# Altium PCB W5500-io_V100.PcbDoc
Units mm, origin at the board's own origin, x right, y up, seen from the top; angles counter-clockwise.
Board outline 20 x 24 mm, 4 copper layers (Top Layer, Internal Plane 1, Internal Plane 2, Bottom Layer), stack 0.844 mm thick; 39 components, 29 nets, 160 pads, 54 vias.
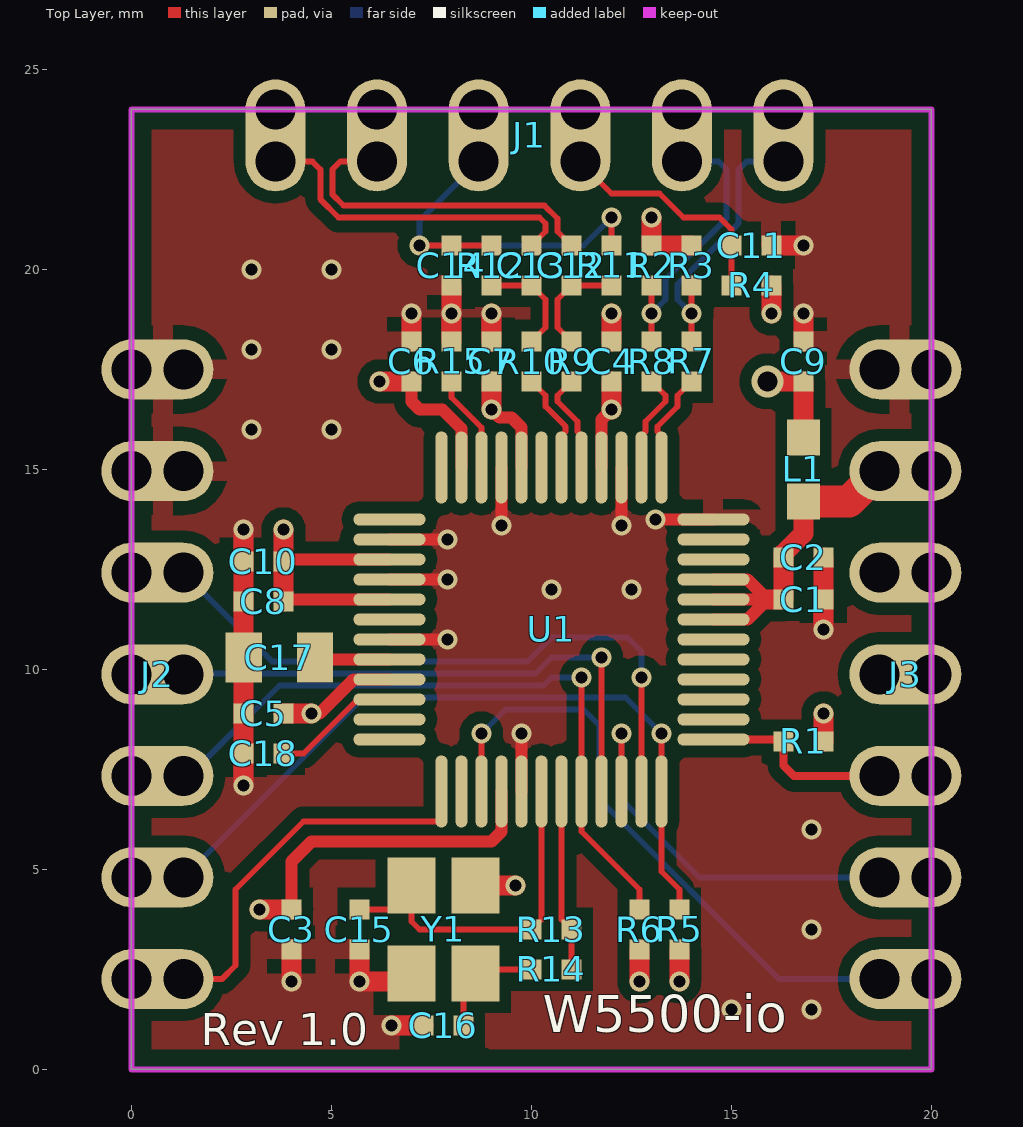
[diagram p0: Top Layer view]
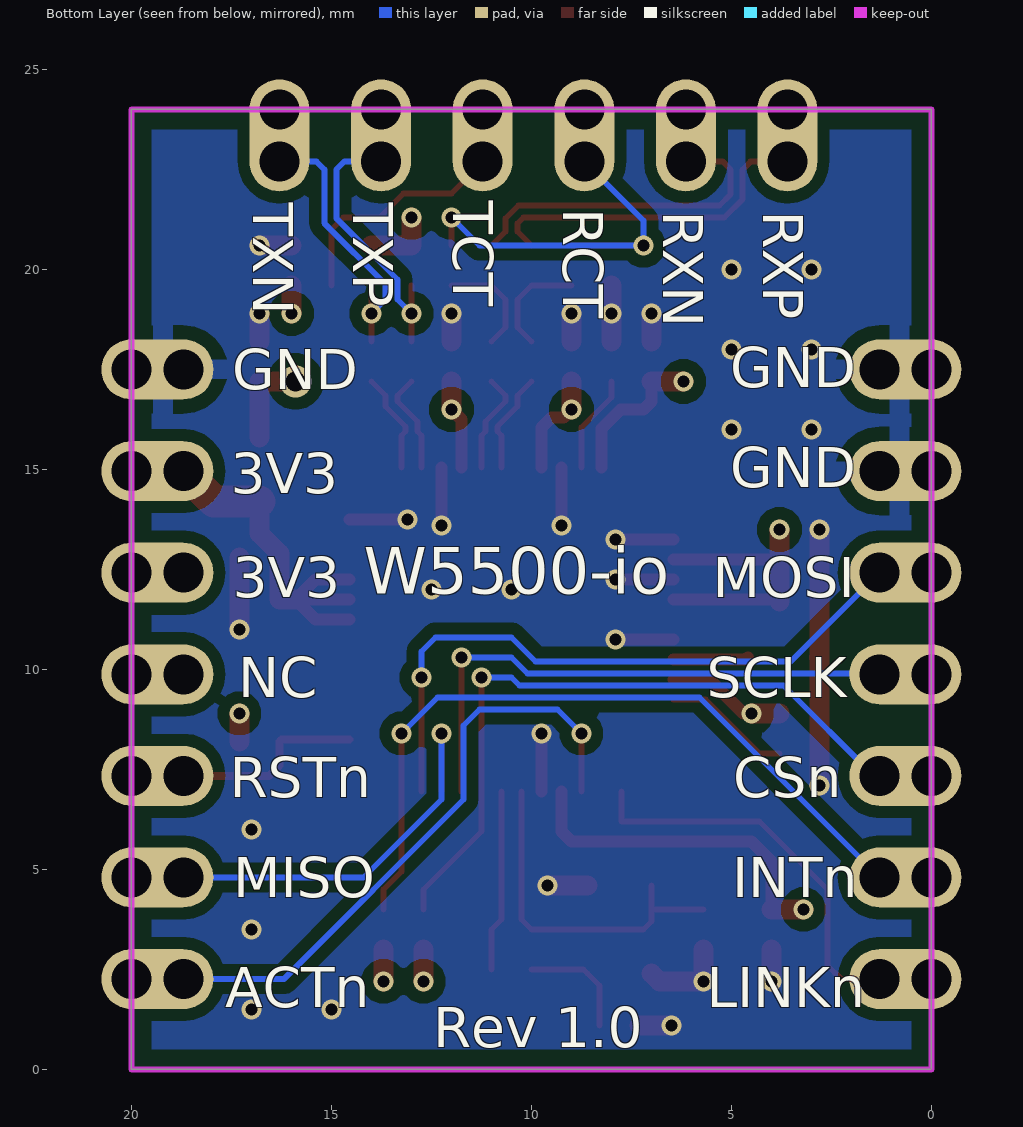
[diagram p1: Bottom Layer view, seen from below]
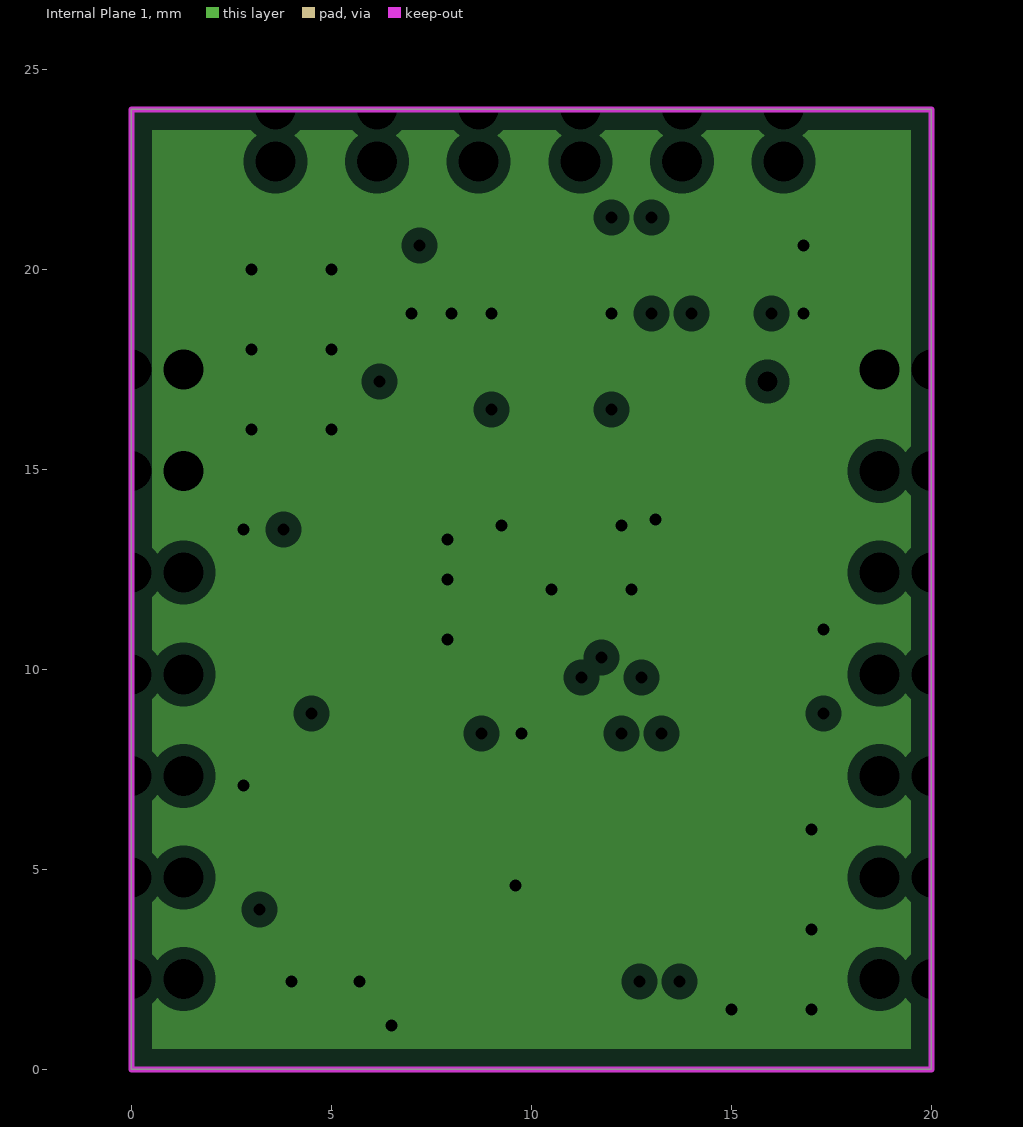
[diagram p2: Internal Plane 1, clearances drawn from the general rule]
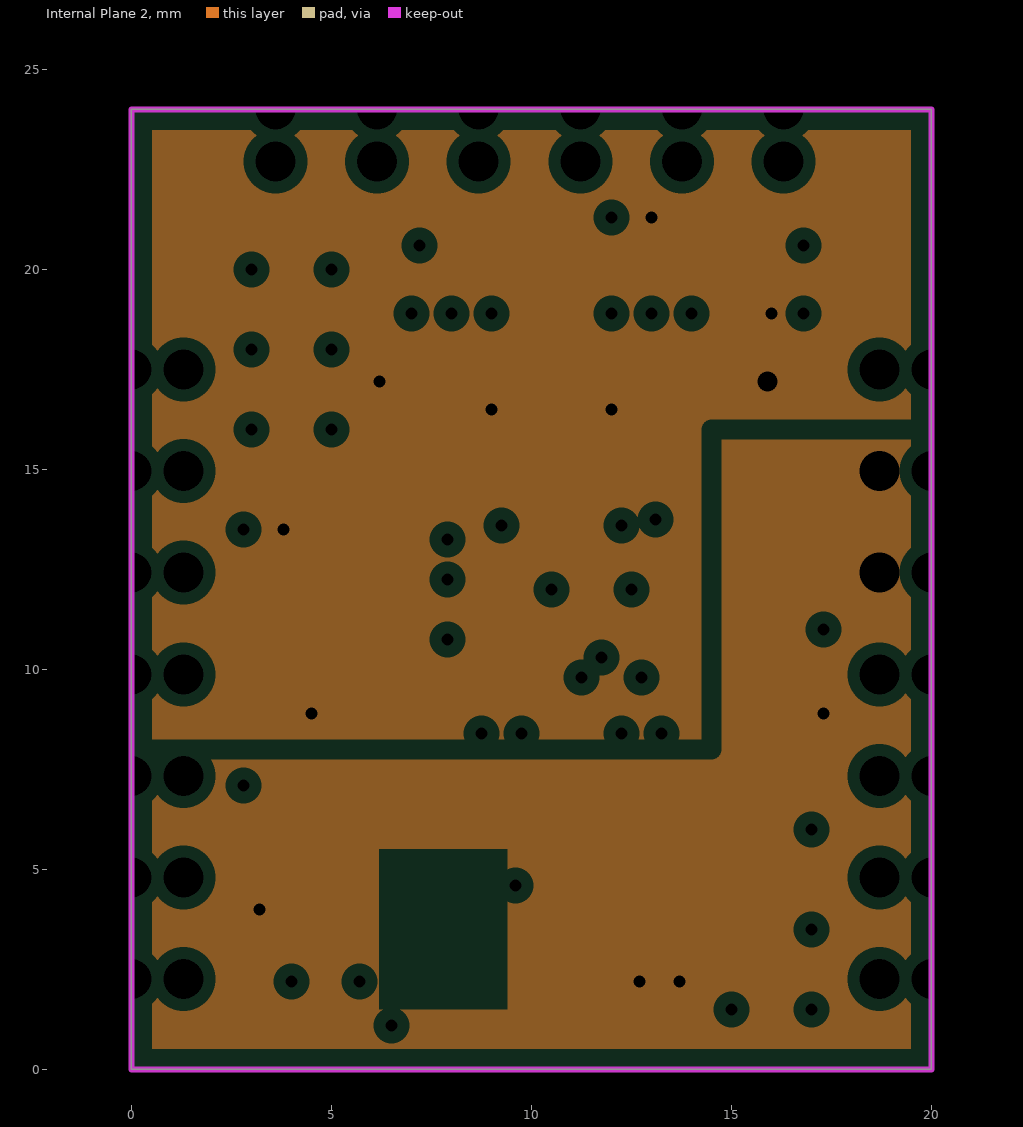
[diagram p3: Internal Plane 2, clearances drawn from the general rule]
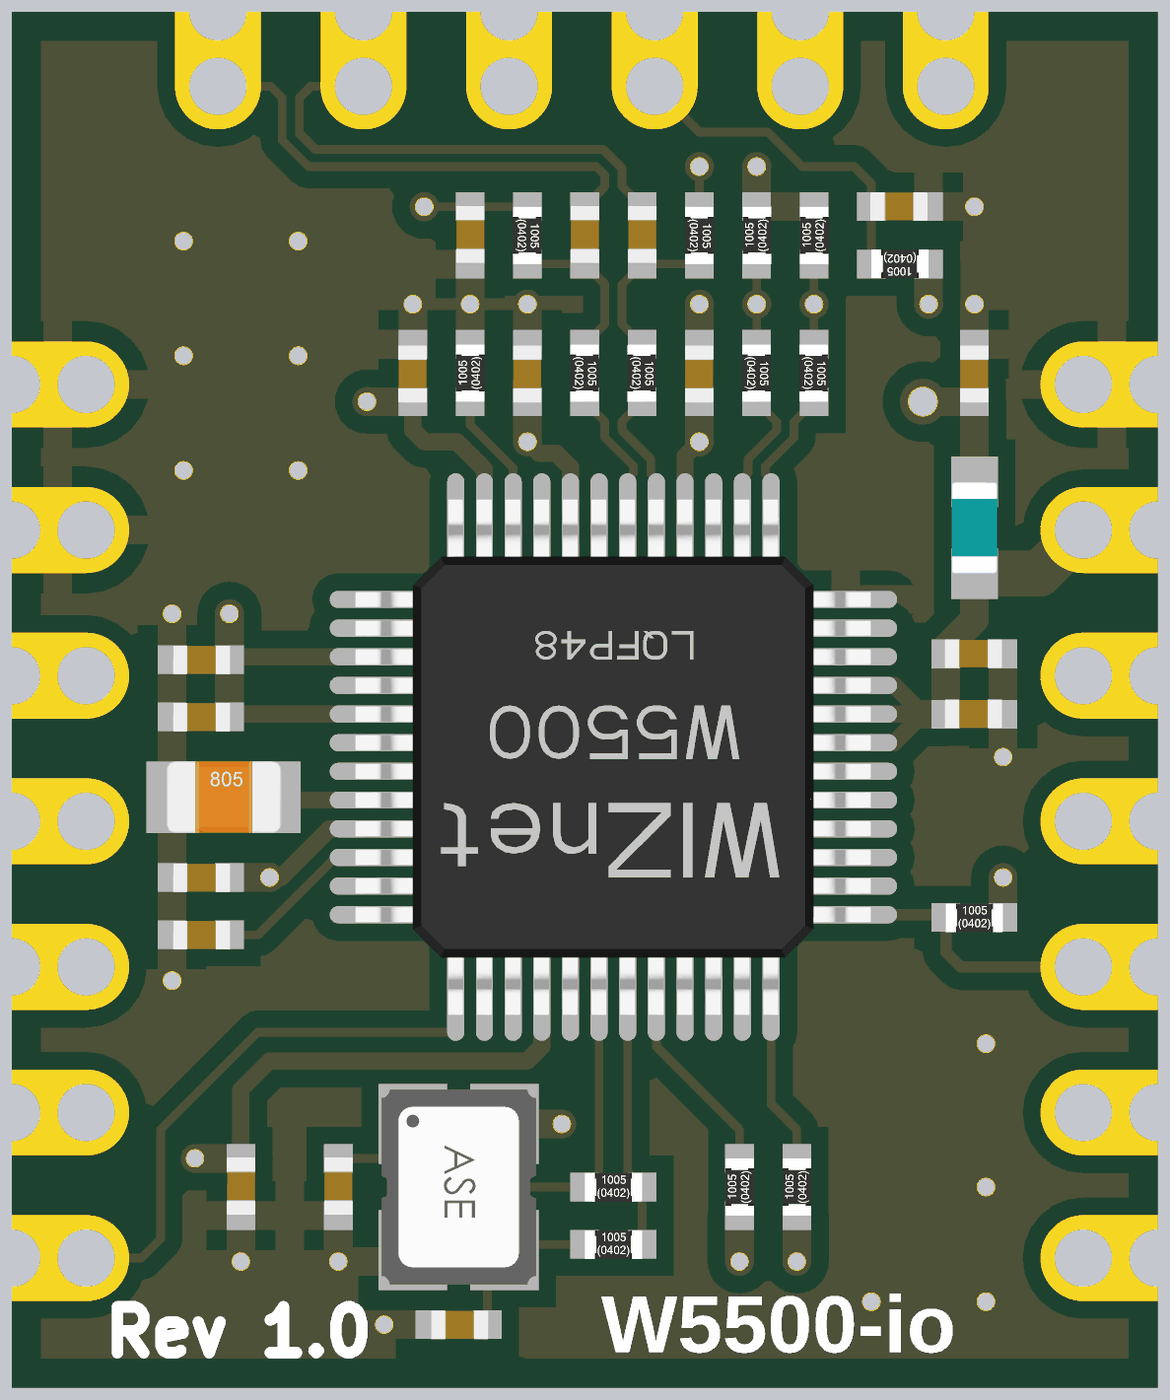
[diagram p4: 3D render of the assembled board from above, using the file's embedded part models]

## Layer stack, top to bottom
Top Solder: solder mask 0.0102, Solder Resist, Dk 3.5
Top Layer: signal copper 0.0356
Dielectric1: core 0.32, FR-4, Dk 4.8
Internal Plane 1: plane copper 0.0356, net GND
Dielectric 6: prepreg 0.127, Dk 4.2
Internal Plane 2: plane copper 0.036, net 3V3A
Dielectric5: core 0.254, FR-4, Dk 4.2
Bottom Layer: signal copper 0.0356
Bottom Solder: solder mask 0.0102, Solder Resist, Dk 3.5

## Board outline
0,0 0,24 20,24 20,0

## Design rules (kind name [scope] priority, off if disabled: settings)
BoardOutlineClearance [All] p1: gap=0.5 ignorepadtopadclearanceinfootprint=FALSE
Clearance [All] p1: gap=0.15 ignorepadtopadclearanceinfootprint=FALSE except(0: Arc-Hole Track-Hole SMDPad-Hole THPad-Hole Via-Hole Fill-Hole Region-Hole Text-Hole; 0.3: Arc-Poly Track-Poly SMDPad-Poly THPad-Poly Via-Poly Fill-Poly Poly-Poly Poly-Region Poly-Text Poly-Hole)
DiffPairsRouting [All] p1: maxlimit=0.15 minlimit=0.15 mostfreqgap=0.15 toplayer_minwidth=0.15 toplayer_maxwidth=0.15 toplayer_prefwidth=0.15 bottomlayer_minwidth=0.15 bottomlayer_maxwidth=0.15 bottomlayer_prefwidth=0.15 maxuncoupledlength=15.24
HoleSize [All] p1: absolutevalues=TRUE maxlimit=4.064 minlimit=0.025 maxpercent=80.000 minpercent=20.000
PlaneClearance [All] p1: clearance=0.3
PlaneConnect [All] p1: planeconnectstyle=Direct reliefexpansion=0.508 reliefentries=4 reliefconductorwidth=0.254 reliefairgap=0.254
PolygonConnect [All] p1: thpad.connectstyle=Relief thpad.reliefconductorwidth=0.5 thpad.reliefentries=4 thpad.polygonreliefangle="90 Angle" thpad.airgapwidth=0.35 smdpad.connectstyle=Relief smdpad.reliefconductorwidth=0.5 smdpad.reliefentries=4 smdpad.polygonreliefangle="90 Angle" smdpad.airgapwidth=0.35 via.connectstyle=Direct via.reliefconductorwidth=0.254 via.reliefentries=4 via.polygonreliefangle="90 Angle" via.airgapwidth=0.254
RoutingVias [All] p1: holewidth=0.3 width=0.5 viastyle="Through Hole" minholewidth=0.3 minwidth=0.5 maxholewidth=0.5 maxwidth=0.8
SolderMaskExpansion [All] p1: expansion=0 istentingtop=FALSE
Width [All] p1: maxlimit=2.54 minlimit=0.102 preferedwidth=0.152
26 further rules are at their usual default settings.

## Classes and differential pairs
differential pair NewDifferentialPair5: +NetC13_1 -NetC12_1
differential pair NewDifferentialPair4: +NetR10_2 -NetR9_2
differential pair NewDifferentialPair3: +NetR8_2 -NetR7_2
differential pair NewDifferentialPair2: +RX_N -RX_P
differential pair NewDifferentialPair1: +TX_N -TX_P

## Components (designator, comment, footprint, x,y, rotation, side; value= is the part's Value field where it differs from the comment)
C1 "1uF" CAP-0402 16.8,11.75 r180 top
C2 "0.1uF" CAP-0402 16.8,12.8 r180 top
C3 "0.1uF" CAP-0402 4,3.5 r90 top
C4 "1uF" CAP-0402 12,17.7 r270 top
C5 "0.1uF" CAP-0402 3.3,8.9 r0 top
C6 "0.1uF" CAP-0402 7,17.7 r270 top
C7 "1uF" CAP-0402 9,17.7 r270 top
C8 "0.1uF" CAP-0402 3.3,11.7 r0 top
C9 "0.1uF" CAP-0402 16.8,17.7 r270 top
C10 "0.1uF" CAP-0402 3.3,12.7 r0 top
C11 "22nF" CAP-0402 15.5,20.6 r180 top
C12 "6.8nF" CAP-0402 11,20.1 r90 top
C13 "6.8nF" CAP-0402 10,20.1 r90 top
C14 "0.1uF" CAP-0402 8,20.1 r90 top
C15 "18pF" CAP-0402 5.7,3.5 r90 top
C16 "18pF" CAP-0402 7.8,1.1 r0 top
C17 "4.7uF" CAP-0805 3.7,10.3 r0 top
C18 "0.1uF" CAP-0402 3.3,7.9 r0 top
J1 "2.54mm 1x6 Pin Header DIP" IDC-1X6(WI510IO) 16.3,22.7 r180 top
J2 "2.54mm 1x7 Pin Header DIP" IDC-1X7(WI510IO) 1.3,17.5 r270 top
J3 "2.54mm 1x7 Pin Header DIP" IDC-1X7(WI510IO) 20,17.5 r270 top
L1 "HH-1M1608-121JT" IND-0603 16.8,15 r90 top
R1 "4.7K" RES-0402 16.8,8.2 r0 top
R2 "49.9R" RES-0402 13,20.1 r90 top
R3 "49.9R" RES-0402 14,20.1 r90 top
R4 "10R/1%" RES-0402 15.5,19.6 r180 top
R5 "4.7K" RES-0402 13.7,3.5 r90 top
R6 "4.7K" RES-0402 12.7,3.5 r90 top
R7 "3.3R" RES-0402 14,17.7 r270 top
R8 "3.3R" RES-0402 13,17.7 r270 top
R9 "3.3R" RES-0402 11,17.7 r270 top
R10 "3.3R" RES-0402 10,17.7 r270 top
R11 "49.9R" RES-0402 12,20.1 r270 top
R12 "49.9R" RES-0402 9,20.1 r270 top
R13 "1M" RES-0402 10.5,3.5 r0 top
R14 "0R" RES-0402 10.5,2.5 r0 top
R15 "12.4K/1%" RES-0402 8,17.7 r90 top
U1 "W5500" W5500-LQFP48 10.5,11 r270 top locked
Y1 "25MHz" OSC-82J0626 7.8,3.5 r270 top

## Footprints (in the part's own frame and the unit in brackets; to place one, negate y for a bottom-side part, rotate by r counter-clockwise, add the part's x,y. Pads: shape width x height; smd on the part's side, far side on the other; paste and mask are expansions set on the pad)
CAP-0402 [mm]
  rect 0.5x0.5 smd: 1(-0.5,0) 2(0.5,0)
  body extent -0.48,-0.25 0.52,0.25, height 0.6
CAP-0805 [mil]
  rect 36x49 smd: 1(-35,0)
  rect 35.43x49 smd: 2(35,0)
  body extent -39,-24 40,25, height 31
IDC-1X6(WI510IO) [mm]
  oval 1.5x2.5 hole 1 copper offset 0,-0.5: 1(0,0) 2(2.54,0) 3(5.08,0) 4(7.62,0) 5(10.16,0) 6(12.7,0)
  oval 1.5x2.5 hole 1 copper offset 0,0.5: 1(0,-1.3) 2(2.54,-1.3) 3(5.08,-1.3) 4(7.62,-1.3) 5(10.16,-1.3) 6(12.7,-1.3)
IDC-1X7(WI510IO) [mm]
  oval 1.5x2.5 hole 1 copper offset 0,-0.5: 1(0,0) 2(2.54,0) 3(5.08,0) 4(7.62,0) 5(10.16,0) 6(12.7,0) 7(15.24,0)
  oval 1.5x2.5 hole 1 copper offset 0,0.5: 1(0,-1.3) 2(2.54,-1.3) 3(5.08,-1.3) 4(7.62,-1.3) 5(10.16,-1.3) 6(12.7,-1.3) 7(15.24,-1.3)
IND-0603 [mm] "Inductor 0603(1608)"
  rect 0.89x0.82 smd: 1(-0.8,0) 2(0.8,0)
  body extent -0.8,-0.4 0.8,0.4, height 0.95
OSC-82J0626 [mm]
  rect 1.4x1.2 smd: 1(-1.1,-0.8) 2(1.1,-0.8) 3(1.1,0.8) 4(-1.1,0.8)
  body extent -1.7,-1.35 1.7,1.35, height 1.06
RES-0402 [mm]
  rect 0.5x0.5 smd: 1(-0.5,0) 2(0.5,0)
  body extent -0.5,-0.25 0.5,0.25, height 0.35
W5500-LQFP48 [mm]
  oval 1.8x0.3 smd: 1(-4.05,2.75) 2(-4.05,2.25) 3(-4.05,1.75) 4(-4.05,1.25) 5(-4.05,0.75) 6(-4.05,0.25) 7(-4.05,-0.25) 8(-4.05,-0.75) 9(-4.05,-1.25) 10(-4.05,-1.75) 11(-4.05,-2.25) 12(-4.05,-2.75) 25(4.05,-2.75) 26(4.05,-2.25) 27(4.05,-1.75) 28(4.05,-1.25) 29(4.05,-0.75) 30(4.05,-0.25) 31(4.05,0.25) 32(4.05,0.75) 33(4.05,1.25) 34(4.05,1.75) 35(4.05,2.25) 36(4.05,2.75)
  oval 0.3x1.8 smd: 13(-2.75,-4.05) 14(-2.25,-4.05) 15(-1.75,-4.05) 16(-1.25,-4.05) 17(-0.75,-4.05) 18(-0.25,-4.05) 19(0.25,-4.05) 20(0.75,-4.05) 21(1.25,-4.05) 22(1.75,-4.05) 23(2.25,-4.05) 24(2.75,-4.05) 37(2.75,4.05) 38(2.25,4.05) 39(1.75,4.05) 40(1.25,4.05) 41(0.75,4.05) 42(0.25,4.05) 43(-0.25,4.05) 44(-0.75,4.05) 45(-1.25,4.05) 46(-1.75,4.05) 47(-2.25,4.05) 48(-2.75,4.05)
  body extent -4.5,-4.5 4.5,4.5, height 1.65

## Part data
C1 C2 C3 C4 C5 C6 C7 C8 C9 C10 C11 C12 C13 C14 C15 C16 C18: library part CAP-0402, "Ceramic CAP 0402(1005)"
C17: library part CAP-0805, "Ceramic CAP 0805(2012)"
L1: library part IND-0603, "Inductor 0603(1608)"
R1 R2 R3 R4 R5 R6 R7 R8 R9 R10 R11 R12 R13 R14 R15: library part RES-0402, "RES-0402"
U1: "WIZnet Hardwired TCP/IP Chip"
Y1: library part OSC-82J0626-25MHz, "X-tal 25MHz,3.2x2.5 SMD, CL=18pF"

## Via types
v1: diameter 0.508, hole 0.305, Top Layer to Bottom Layer, tented both sides, 31 vias
v2: diameter 0.5, hole 0.3, Top Layer to Bottom Layer, tented both sides, 22 vias
v3: diameter 0.8, hole 0.5, Top Layer to Bottom Layer, tented both sides, 1 vias

## Nets (pads, with @x,y where several pads share a name; then routed paths per layer and width w, separated by ;. In a path a pad name is that pad's centre, name@x,y a point inside that pad or via, vN(x,y) a via of type N, cw(c..) or ccw(c..) an arc to the next point about the centre after c; other vN are vias at no path point)
3V3: C1.2 C2.2 C3.2 J3.2 J3.3 L1.1 R1.2 R5.1 R6.1 U1.28 U1.43 U1.44 U1.45 | length 20.6
  Top Layer w0.3: C3.2 4,5.2 4.5,5.7 9,5.7 9.25,5.95 U1.28 ; U1.43 15.4,11.25 15.9,11.75 ; U1.44 15.9,11.75 ; U1.45 15.4,12.25 15.9,11.75
  Top Layer w0.5: v2(3.2,4) C3.2 ; v2(12.7,2.2) R6.1 ; v2(13.7,2.2) R5.1 ; 15.9,11.75 C1.2 C2.2 16.3,12.9 16.8,13.4 L1.1 ; R1.2 v2(17.3,8.9)
  Top Layer w0.8: L1.1 17.94,14.2 J3.2@18.7,14.96
3V3A: C4.2 C5.2 C6.2 C7.2 C8.2 C9.2 C10.2 L1.2 R2.2 R3.2 R4.1 U1.4 U1.8 U1.11 U1.15 U1.17 U1.21 | length 23.5
  Top Layer w0.3: C8.2 3.85,11.75 U1.17 ; C10.2 3.85,12.75 U1.15 ; v1(4.5,8.9) 4.7,8.9 5.55,9.75 U1.21 ; C6.2 7,16.7 7.2,16.5 7.77,16.5 8.25,16.02 U1.11 ; v1(9,16.5) 9.2,16.3 9.5,16.3 9.75,16.05 U1.8 ; U1.4 11.75,16.25 v1(12,16.5)
  Top Layer w0.5: C5.2 v1(4.5,8.9) ; C8.2 C10.2 v1(3.8,13.5) ; v1(6.2,17.2) C6.2 ; v1(9,16.5) C7.2 ; v1(12,16.5) C4.2 ; v1(13,21.3) R2.2 R3.2 ; v3(15.9,17.2) C9.2 L1.2 ; v1(16,18.9) R4.1
ACTn: J3.7 U1.27 | length 16.8
  Top Layer w0.15: U1.27 v2(8.75,8.4)
  Bottom Layer w0.15: v2(8.75,8.4) 9.35,9 11.3,9 11.7,8.6 11.7,6.75 16.19,2.26 18.7,2.26 J3.7@20,2.26
CSn: J2.5 R6.2 U1.32 | length 18.7
  Top Layer w0.15: v2(11.25,9.8) U1.32 11.25,5.95 12.7,4.5 R6.2
  Bottom Layer w0.15: J2.5@0,7.34 1.3,7.34 1.44,7.34 3.7,9.6 10.3,9.6 10.5,9.8 v2(11.25,9.8)
GND: C1.1 C2.1 C3.1 C4.1 C5.1 C6.1 C7.1 C8.1 C9.1 C10.1 C11.1 C14.1 C15.1 C16.1 C17.1 C18.1 J2.1 J2.2 J3.1 R15.2 U1.3 U1.9 U1.14 U1.16 U1.19 U1.29 U1.48 Y1.2 Y1.4 | length 28.1
  Top Layer w0.3: U1.19 v2(7.9,10.75) ; U1.16 v2(7.9,12.25) ; U1.14 v2(7.9,13.25) ; v2(9.25,13.6) U1.9 ; U1.29 v2(9.75,8.4) ; v2(12.25,13.6) U1.3 ; v2(13.1,13.75) U1.48
  Top Layer w0.5: v1(2.8,7.1) C18.1 C5.1 2.8,10.289 C17.1 2.8,10.311 C8.1 C10.1 v1(2.8,13.5) ; v2(4,2.2) C3.1 ; C15.1 v2(5.7,2.2) 6.8,2.2 Y1.2 ; v2(6.5,1.1) C16.1 ; C6.1 v1(7,18.9) ; R15.2 v1(8,18.9) C14.1 ; Y1.4 v2(9.6,4.6) ; C7.1 v1(9,18.9) ; C4.1 v1(12,18.9) ; C11.1 v1(16.8,20.6) ; C9.1 v1(16.8,18.9) ; v2(17.3,11) C1.1 C2.1
  other v1: 15,1.5 17,1.5 17,3.5 17,6 10.5,12 12.5,12 3,16 5,16 3,18 5,18 3,20 5,20
INTn: J2.6 R5.2 U1.36 | length 20.1
  Top Layer w0.15: v2(13.25,8.4) U1.36 13.25,4.95 13.7,4.5 R5.2
  Bottom Layer w0.15: J2.6@0,4.8 1.3,4.8 5.8,9.3 12.35,9.3 v2(13.25,8.4)
LINKn: J2.7 U1.25 | length 9.9
  Top Layer w0.15: J2.7@1.3,2.26 2.26,2.26 2.6,2.6 2.6,4.5 4.3,6.2 7.75,6.2 U1.25
MISO: J3.6 U1.34 | length 11.7
  Top Layer w0.15: U1.34 v2(12.25,8.4)
  Bottom Layer w0.15: v2(12.25,8.4) 12.25,6.75 14.2,4.8 18.7,4.8 J3.6@20,4.8
MOSI: J2.3 U1.35 | length 17.6
  Top Layer w0.15: U1.35 v2(12.75,9.8)
  Bottom Layer w0.15: J2.3@0,12.42 1.3,12.42 3.52,10.2 9.9,10.2 10.5,10.8 12.4,10.8 12.75,10.45 v2(12.75,9.8)
NetC12_1: C12.1 R9.1 R11.2 | length 2.7
  Top Layer w0.15: R9.1 10.65,18.55 10.65,19.25 C12.1 R11.2
NetC13_1: C13.1 R10.1 R12.2 | length 2.7
  Top Layer w0.15: R12.2 C13.1 10.35,19.25 10.35,18.55 R10.1
NetC16_2: C16.2 R14.1 Y1.3 | length 2.9
  Top Layer w0.15: C16.2 8.3,2.1 Y1.3 8.7,2.5 R14.1
NetC17_2: C17.2 U1.20 | length 1.9
  Top Layer w0.3: C17.2 4.639,10.25 U1.20
NetC18_2: C18.2 U1.22 | length 3.2
  Top Layer w0.15: C18.2 4.3,7.9 5.65,9.25 U1.22
NetR7_2: R7.2 U1.1 | length 2.5
  Top Layer w0.15: U1.1 13.25,15.85 13.15,15.95 13.15,16.075 13.65,16.575 13.65,16.85 R7.2
NetR8_2: R8.2 U1.2 | length 2.5
  Top Layer w0.15: U1.2 12.75,15.85 12.85,15.95 12.85,16.199 13.35,16.699 13.35,16.85 R8.2
NetR9_2: R9.2 U1.5 | length 2.5
  Top Layer w0.15: R9.2 10.65,16.85 10.65,16.7 11.15,16.2 11.15,15.95 11.25,15.85 U1.5
NetR10_2: R10.2 U1.6 | length 2.5
  Top Layer w0.15: R10.2 10.35,16.85 10.35,16.576 10.85,16.076 10.85,15.95 10.75,15.85 U1.6
NetR15_1: R15.1 U1.10 | length 2.5
  Top Layer w0.15: R15.1 8,16.8 8.75,16.05 U1.10
RCT: C14.2 J1.4 R11.1 R12.1 | length 10.3
  Top Layer w0.15: v1(7.2,20.6) C14.2 R12.1 ; R11.1 v1(12,21.3)
  Bottom Layer w0.15: J1.4@8.68,22.7 7.2,21.22 v1(7.2,20.6) 11.3,20.6 v1(12,21.3)
RSTn: J3.5 R1.1 U1.37 | length 4.9
  Top Layer w0.2: U1.37 16.25,8.25 R1.1 16.3,7.6 16.56,7.34 J3.5@18.7,7.34
RX_N: C12.2 J1.5 | length 8.5
  Top Layer w0.15: J1.5@6.14,22.7 5.22,22.7 5.02,22.5 5.02,21.88 5.3,21.6 10.324,21.6 10.65,21.274 10.65,20.95 C12.2
RX_P: C13.2 J1.6 | length 8.5
  Top Layer w0.15: J1.6@3.6,22.7 4.52,22.7 4.72,22.5 4.72,21.756 5.176,21.3 10.2,21.3 10.35,21.15 10.35,20.95 C13.2
SCLK: J2.4 U1.33 | length 15.3
  Top Layer w0.15: U1.33 v2(11.75,10.3)
  Bottom Layer w0.15: J2.4@0,9.88 1.3,9.88 1.32,9.9 10.1,9.9 10.5,10.3 v2(11.75,10.3)
TCT: C11.2 J1.3 R4.2 | length 7.2
  Top Layer w0.15: J1.3@11.22,24 11.22,22.7 11.22,22.68 12,21.9 13.2,21.9 13.8,21.3 14.7,21.3 15,21 C11.2 R4.2
TX_N: J1.1 R3.1 R7.1 | length 7
  Top Layer w0.15: R7.1 v1(14,18.9) R3.1
  Bottom Layer w0.15: v1(14,18.9) 13.65,19.25 13.65,19.626 15.18,21.156 15.18,22.5 15.38,22.7 J1.1@16.3,22.7
TX_P: J1.2 R2.1 R8.1 | length 7
  Top Layer w0.15: R8.1 v1(13,18.9) R2.1
  Bottom Layer w0.15: v1(13,18.9) 13.35,19.25 13.35,19.75 14.88,21.28 14.88,22.5 14.68,22.7 J1.2@13.76,22.7
XI: C15.2 R13.1 U1.30 Y1.1 | length 9.4
  Top Layer w0.15: C15.2 7,4 Y1.1 7,3.7 7.2,3.5 R13.1 10.25,3.75 U1.30
XO: R13.2 R14.2 U1.31 | length 4.6
  Top Layer w0.15: U1.31 10.75,3.75 R13.2 R14.2
pads on no net: J3.4 U1.7 U1.12 U1.13 U1.18 U1.23 U1.24 U1.26 U1.38 U1.39 U1.40 U1.41 U1.42 U1.46 U1.47

## Polygon pours and split planes (outlines as drawn)
GND on Bottom Layer "NONET_L02_P-001" (solid, remove dead copper, pour order 1): -1,25 -1,-1 21,-1 21,25
GND on Top Layer "NONET_L02_P-001" (solid, remove dead copper, pour order 0): -1,-1 21,-1 21,25 -1,25 -1,21.5
3V3A on Internal Plane 2 (split plane): 19.49,16.252 14.5,16.252 14.435,16.244 14.374,16.218 14.322,16.178 14.282,16.126 14.256,16.065 14.248,16 14.248,8.252 0.51,8.252 0.51,23.49 19.49,23.49
3V3 on Internal Plane 2 (split plane): 19.49,0.51 0.51,0.51 0.51,7.748 14.5,7.748 14.565,7.756 14.626,7.782 14.678,7.822 14.718,7.874 14.744,7.935 14.752,8 14.752,15.748 19.49,15.748
GND on Internal Plane 1 (split plane): 19.49,0.51 0.51,0.51 0.51,23.49 19.49,23.49

## Keep-outs
Keep-Out Layer:
  the board outline again, w0.15
  text ".Layer_Name" at 9.398,44.45 h1.52

## Other copper
Top Layer:
  text ".Layer_Name" at 9.398,44.45 h1.52
Bottom Layer:
  text ".Layer_Name" at 9.398,44.45 h1.52
Internal Plane 1 (plane layer: these items are gaps in the copper):
  text ".Layer_Name" at 9.398,44.45 h1.52
Internal Plane 2 (plane layer: these items are gaps in the copper):
  rectangle: 6.2,1.5 9.4,5.5
  lines w0.5: 0,8 14.5,8 14.5,16 20,16
  text ".Layer_Name" at 9.398,44.45 h1.52

## Silkscreen, mask and mechanical layers (free items; w line width, h text height)
Top Overlay:
  text ".Layer_Name" at 9.398,44.482 h1.52
  text "W5500-io" at 10.288,0.619 h1.6
  text "Rev 1.0" at 1.737,0.6 h0.8
Bottom Overlay:
  text ".Layer_Name" at 9.398,44.45 h1.52
  text "TCT" at 11.95,21.724 h1 r90
  text "TXP" at 14.45,21.671 h1 r90
  text "TXN" at 16.95,21.671 h1 r90
  text "RCT" at 9.2,21.526 h1 r90
  text "RXP" at 4.2,21.474 h1 r90
  text "RXN" at 6.7,21.474 h1 r90
  text "GND" at 5.026,17.05 h1
  text "GND" at 17.476,17 h1
  text "GND" at 5.026,14.55 h1
  text "3V3" at 17.524,14.4 h1
  text "MOSI" at 5.466,11.8 h1
  text "3V3" at 17.474,11.8 h1
  text "W5500-io" at 14.189,11.5 h2
  text "SCLK" at 5.616,9.3 h1
  text "NC" at 17.328,9.3 h1
  text "CSn" at 4.955,6.8 h1
  text "RSTn" at 17.545,6.8 h1
  text "INTn" at 4.981,4.3 h1
  text "MISO" at 17.454,4.3 h1
  text "LINKn" at 5.623,1.55 h1
  text "ACTn" at 17.65,1.55 h1
  text "Rev 1.0" at 12.454,0.55 h1
Top Paste:
  text ".Layer_Name" at 9.398,44.45 h1.52
Bottom Paste:
  text ".Layer_Name" at 9.398,44.45 h1.52
Top Solder:
  text ".Layer_Name" at 9.398,44.45 h1.52
Bottom Solder:
  text ".Layer_Name" at 9.398,44.45 h1.52
Drill Guide:
  text ".Layer_Name" at 9.398,44.45 h1.52
Mechanical 2:
  lines w0.127: 34.846,16.129 61.008,16.129 ; 34.846,18.923 61.008,18.923 ; 33.5,4.775 ccw(c34.211,4.775) 34.211,4.064 61.389,4.064 ccw(c61.389,4.775) 62.1,4.775 62.1,24.003 ccw(c61.389,24.003) 61.389,24.714 34.211,24.714 ccw(c34.211,24.003) 33.5,24.003 33.5,4.775
  lines w0.15: 0,0 0,24 20,24 20,0 0,0
  text "BOARD NAME : W5500-io" at 0,55.626 h1.52
  text "VERSION : V100" at 0,52.832 h1.52
  text "SIZE : 20mmX24mmX1.0T" at 0,50.038 h1.52
  text "GERBER DATE : 2022.06.28" at 0,47.244 h1.52
  text "LAYER :" at 0,44.45 h1.52
  text "Layer Stack Up Detail for:" at 34.973,22.606 h1.02
  text "W5500-io_V100.PcbDoc" at 34.846,20.193 h1.27
  text "Layer Name : 4L  1.0T" at 34.973,17.018 h1.02
  text "Top Layer" at 34.846,13.335 h1.52
  text "Internal Plane 1 (GND)" at 34.846,10.541 h1.52
  text "Internal Plane 2 (POWER)" at 34.846,7.874 h1.52
  text "Bottom Layer" at 34.846,5.334 h1.52
  text "KS Technology artwork" at 33.5,0 h5.08
Drill Drawing:
  text ".Layer_Name" at 9.398,44.45 h1.52
  text ".Legend" at 35.532,27.432 h1.02

## Dimensions
0,0 to 0,24 on Mechanical 2
0,0 to 20,0 on Mechanical 2

## Text inside footprints (layer, text, board x,y; h text height)
U1: Mechanical 3 "WIZnet" at 12.786,10.492 h0.91 r180